# Altium PCB SFPextension.PcbDoc
Units mm, origin at the board's own origin, x right, y up, seen from the top; angles counter-clockwise.
Board outline 66.9 x 25.57 mm, 2 copper layers (Top Layer, Bottom Layer); 3 components, 14 nets, 47 pads, 51 vias.
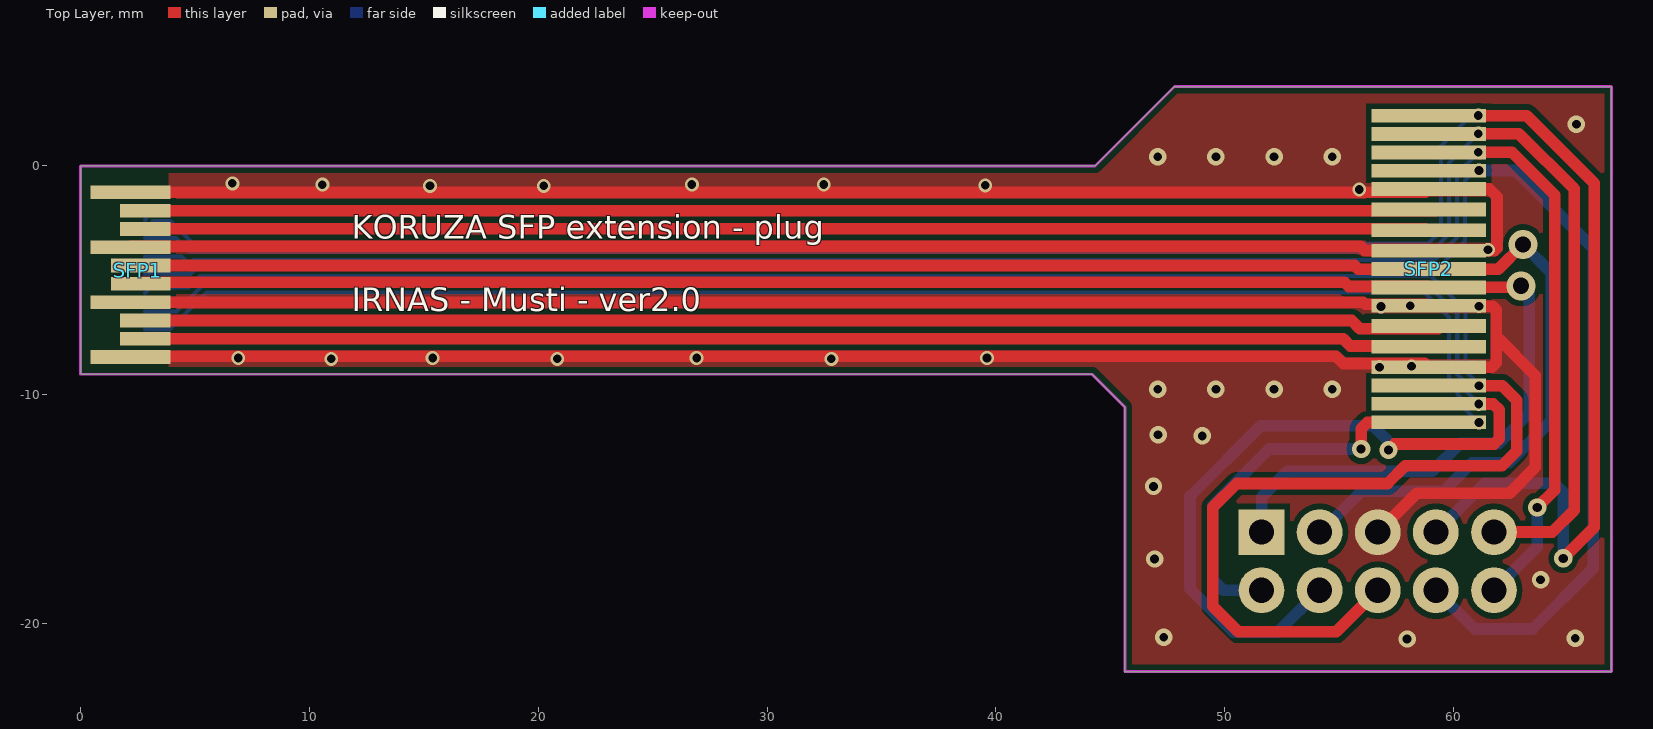
[diagram p0: Top Layer view]
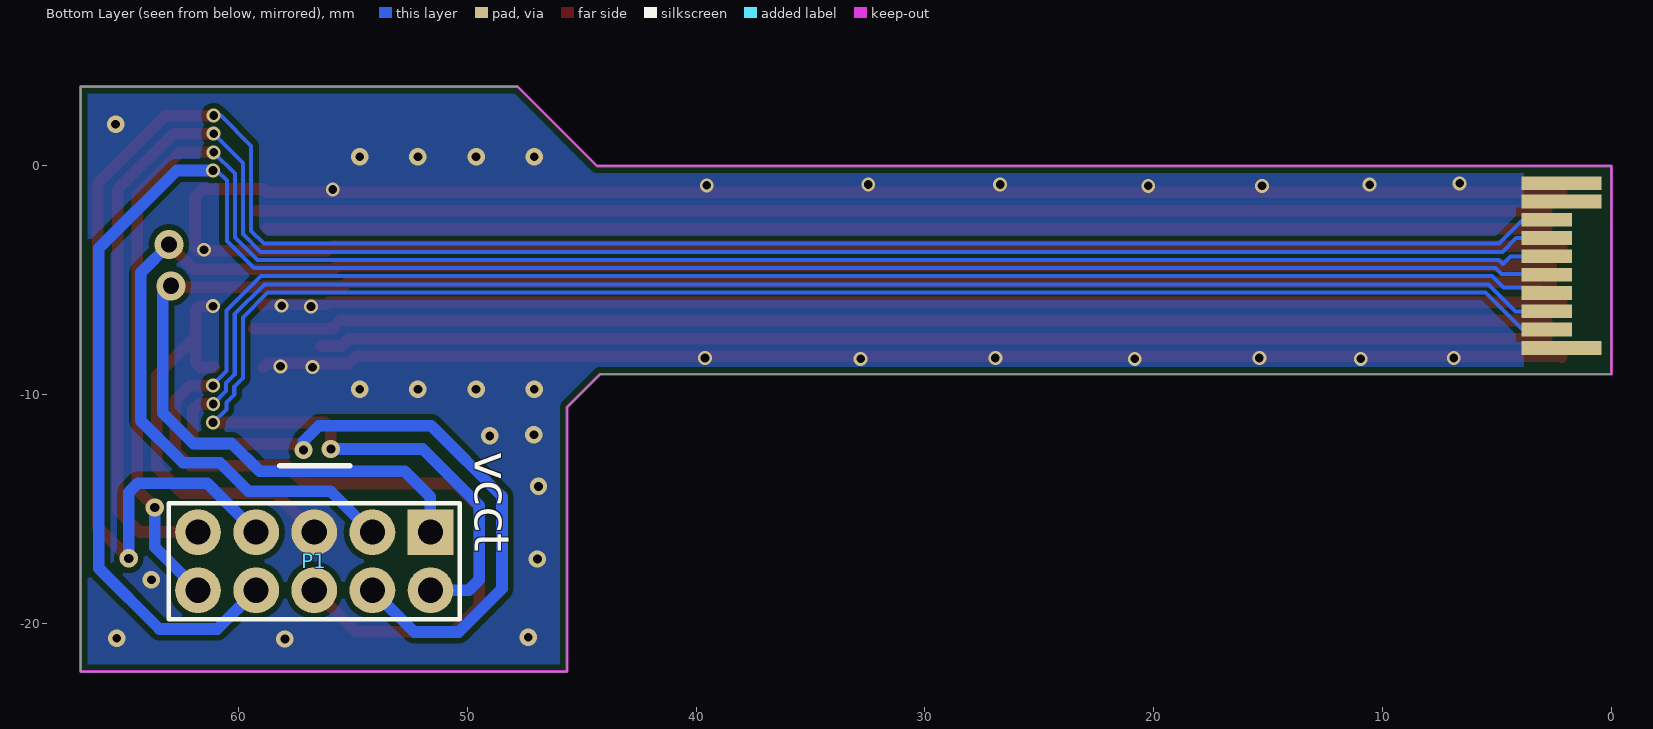
[diagram p1: Bottom Layer view, seen from below]

## Layer stack, top to bottom
Top Solder: solder mask 0.0102, Solder Resist, Dk 3.5
Top Layer: signal copper 0.0356
Dielectric1: dielectric 0.32, FR-4, Dk 4.8
Bottom Layer: signal copper 0.0356
Bottom Solder: solder mask 0.0102, Solder Resist, Dk 3.5

## Board outline
0,-9.1 0,0 44.327,0 47.8,3.473 66.9,3.473 66.9,-22.098 45.639,-22.098 45.639,-10.541 44.198,-9.1

## Design rules (kind name [scope] priority, off if disabled: settings)
Clearance Clearance_2 [InPolygon] p1: gap=0.254
Clearance Clearance_3 [(InDifferentialPairClass('All Differential Pairs')) vs (InNet('GND')) and (InPadClass('All Pads'))] p2: gap=0.178
Clearance Clearance_1 [(InDifferentialPairClass('All Differential Pairs')) and not (InPadClass('All Pads')) vs InNet('GND')] p3: gap=0.254
Clearance [All] p4: gap=0.178
DiffPairsRouting [All] p1: maxlimit=0.254 minlimit=0.254 mostfreqgap=0.254 toplayer_minwidth=0.508 toplayer_maxwidth=0.508 toplayer_prefwidth=0.508 bottomlayer_minwidth=0.508 bottomlayer_maxwidth=0.508 bottomlayer_prefwidth=0.508 maxuncoupledlength=12.7
MinimumSolderMaskSliver [All] p1: minsoldermaskwidth=0.025
PlaneConnect [All] p1: planeconnectstyle=Direct reliefexpansion=0.508 reliefentries=4 reliefconductorwidth=0.254 reliefairgap=0.254
PolygonConnect [All] p1: connectstyle=Direct reliefconductorwidth=0.508 reliefentries=4 polygonreliefangle="90 Angle" airgapwidth=0.254
RoutingVias [All] p1: holewidth=0.711 width=1.27 viastyle="Through Hole" minholewidth=0.711 minwidth=1.27 maxholewidth=0.711 maxwidth=1.27
SilkToSilkClearance [All] p1: silktosilkclearance=0
SilkToSolderMaskClearance SilkscreenOverComponentPads [IsPad] p1: minsilkscreentomaskgap=0.025 clearancetoexposedcopper=TRUE
SolderMaskExpansion [All] p1: expansion=0.102
Width [All] p1: maxlimit=2.54 minlimit=0.178 preferedwidth=0.508 minimp=50.000000 maximp=50.000000 favimp=50.000000
25 further rules are at their usual default settings.

## Classes and differential pairs
component class SFPextension: P1 SFP2
differential pair TD: +TD_P -TD_N
differential pair RD: +RD_P -RD_N

## Components (designator, comment, footprint, x,y, rotation, side; value= is the part's Value field where it differs from the comment)
P1 "IDC10" HDR2X5_CEN 51.608,-16.002 r0 bottom
SFP1 "SFP connector" "SFP PCB CON" 2.5,-4.55 r90 top
SFP2 "SFP PCB connector" "SFP pcb con solder" 58.911,-7.706 r90 top

## Footprints (in the part's own frame and the unit in brackets; to place one, negate y for a bottom-side part, rotate by r counter-clockwise, add the part's x,y. Pads: shape width x height; smd on the part's side, far side on the other; paste and mask are expansions set on the pad)
HDR2X5_CEN [mm] "Connector; Header; 5x2 Position"
  rect 2x2 hole 1.1: 1(0,0)
  round 2 hole 1.1: 2(2.54,0) 3(5.08,0) 4(7.62,0) 5(10.16,0) 6(0,2.54) 7(2.54,2.54) 8(5.08,2.54) 9(7.62,2.54) 10(10.16,2.54)
  silkscreen extent -1.27,-1.27 11.43,3.81
"SFP PCB CON" [mm]
  rect 0.6x3.5 smd far side: 1(-3.4,0.325) 9(3,0.325) 10(3.8,0.325)
  rect 0.6x2.2 smd far side: 2(-2.6,-0.325) 3(-1.8,-0.325) 4(-1,-0.325) 5(-0.2,-0.325) 6(0.6,-0.325) 7(1.4,-0.325) 8(2.2,-0.325)
  rect 0.6x3.5 smd: 11(3.4,0.325) 14(1,0.325) 17(-1.4,0.325) 20(-3.8,0.325)
  rect 0.6x2.2 smd: 12(2.6,-0.325) 13(1.8,-0.325) 18(-2.2,-0.325) 19(-3,-0.325)
  rect 0.6x2.6 smd: 15(0.2,-0.125) 16(-0.6,-0.125)
"SFP pcb con solder" [mm]
  rect 0.6x5 smd: 2(-3.49,0) 3(-2.69,0) 4(-1.89,0) 5(7.5,0) 6(8.3,0) 7(9.1,0) 8(9.9,0) 11(6.7,0) 12(5.8,0) 13(4.9,0) 14(4,0) 15(3.2,0) 16(2.4,0) 17(1.6,0) 18(0.71,0) 19(-0.19,0) 20(-1.09,0)

## Part data
P1: library part "Header 5X2A", "Header, 5-Pin, Dual row"

## Via types
v1: diameter 0.61, hole 0.381, Top Layer to Bottom Layer, tented both sides, 26 vias
v2: diameter 0.762, hole 0.381, Top Layer to Bottom Layer, tented both sides, 17 vias
v3: diameter 0.8, hole 0.4, Top Layer to Bottom Layer, tented both sides, 4 vias
v4: diameter 0.61, hole 0.381, Top Layer to Bottom Layer, 2 vias
v5: diameter 1.27, hole 0.711, Top Layer to Bottom Layer, tented both sides, 2 vias

## Nets (pads, with @x,y where several pads share a name; then routed paths per layer and width w, separated by ;. In a path a pad name is that pad's centre, name@x,y a point inside that pad or via, vN(x,y) a via of type N, cw(c..) or ccw(c..) an arc to the next point about the centre after c; other vN are vias at no path point)
GND: P1.3 SFP1.1 SFP1.9 SFP1.10 SFP1.11 SFP1.14 SFP1.17 SFP1.20 SFP2.11 SFP2.14 SFP2.17 SFP2.20 | length 254.4
  Top Layer w0.508: SFP1.20 2.213,-8.312 54.858,-8.312 55.177,-8.631 56.694,-8.631 56.698,-8.628 58.743,-8.628 SFP2.20 ; SFP1.17 56.057,-5.95 56.145,-6.038 58.843,-6.038 SFP2.17 ; SFP1.14 2.213,-3.512 55.936,-3.512 56.13,-3.706 SFP2.14 61.791,-3.706 61.902,-3.595 61.902,-1.345 61.56,-1.003 58.914,-1.003 SFP2.11 58.767,-1.15 SFP1.11 ; P1.3 58.392,-14.298 62.453,-14.298 63.578,-13.173 63.578,-9.156 61.87,-7.448 ; SFP2.20@61.064,-8.796 61.11,-8.749 61.157,-8.796 61.677,-8.796 61.87,-8.603 61.87,-7.448 ; v1(61.11,-6.125) 61.71,-6.125 61.87,-6.284 61.87,-7.448
  other v1: 56.761,-8.793 58.16,-8.756 10.955,-8.429 20.83,-8.429 32.808,-8.429 6.891,-8.394 15.385,-8.389 26.926,-8.394 39.61,-8.392 56.835,-6.14 58.11,-6.107 15.27,-0.866 20.241,-0.866 39.535,-0.847 10.566,-0.818 26.712,-0.808 32.477,-0.808 6.63,-0.756
  other v2: 57.971,-20.671 65.314,-20.641 47.332,-20.595 63.805,-18.08 46.934,-17.176 46.888,-14.003 49.018,-11.795 47.087,-11.749 47.077,-9.757 49.617,-9.757 52.157,-9.757 54.697,-9.757 47.077,0.403 49.617,0.403 52.157,0.403 54.697,0.403 65.371,1.826
  other v4: 61.51,-3.66 55.879,-1.026
LOS: P1.4 SFP1.8 SFP2.8 | length 95.6
  Top Layer w0.508: v1(61.085,2.203) 63.194,2.203 66.152,-0.754 66.152,-15.787 v3(64.793,-17.147)
  Bottom Layer w0.178: SFP1.8 SFP1.8@2.852,-2.323 ; SFP1.8@3.142,-2.406 3.919,-2.406 4.907,-3.394 58.883,-3.394 59.444,-2.833 59.444,0.88 60.767,2.203 v1(61.085,2.203)
  Bottom Layer w0.508: P1.4 61.362,-13.868 64.396,-13.868 64.793,-14.265 v3(64.793,-17.147)
MOD_DEF0: P1.10 SFP1.6 SFP2.6 | length 84.6
  Top Layer w0.508: SFP2.6@61.146,0.538 v1(61.085,0.599) 62.555,0.599 64.421,-1.267 64.421,-14.161 v3(63.661,-14.921)
  Bottom Layer w0.178: SFP1.6 4.416,-3.95 4.747,-4.281 4.923,-4.105 59.177,-4.105 60.155,-3.128 60.155,-0.331 v1(61.085,0.599)
  Bottom Layer w0.508: P1.10 63.661,-16.649 v3(63.661,-14.921)
MOD_DEF1: P1.9 SFP1.5 SFP2.5 | length 90.8
  Bottom Layer w0.178: SFP1.5 2.854,-4.721 4.81,-4.721 5.07,-4.461 59.325,-4.461 60.51,-3.275 60.51,-0.641 60.953,-0.198 v1(61.114,-0.198)
  Bottom Layer w0.508: P1.9 60.92,-20.234 63.451,-20.234 66.103,-17.582 66.103,-3.596 62.705,-0.198 v1(61.114,-0.198)
MOD_DEF2: P1.8 SFP1.4 SFP2.4 | length 93.3
  Top Layer w0.508: P1.8 54.883,-20.347 50.592,-20.347 49.486,-19.241 49.486,-14.915 50.526,-13.875 57.113,-13.875 57.892,-13.096 62.121,-13.096 62.76,-12.457 62.76,-10.233 62.126,-9.599 v1(61.11,-9.599)
  Bottom Layer w0.178: SFP1.4 3.058,-5.317 4.035,-5.317 4.038,-5.314 4.72,-5.314 5.218,-4.816 59.016,-4.816 60.519,-6.319 60.519,-8.966 61.11,-9.558 v1(61.11,-9.599)
RATE_SEL: P1.5 SFP1.7 SFP2.7 | length 85.5
  Top Layer w0.508: v1(61.085,1.411) 62.857,1.411 65.269,-1.001 65.269,-15.041 64.315,-15.995 P1.5@61.837,-15.995
  Bottom Layer w0.178: SFP1.7 4.16,-3.15 4.759,-3.75 59.03,-3.75 59.799,-2.98 59.799,0.124 v1(61.085,1.411)
RD_N: SFP1.12 SFP2.12 | length 56.4
  Top Layer w0.508: SFP1.12 SFP2.12@59.213,-1.95
RD_P: SFP1.13 SFP2.13 | length 55.9
  Top Layer w0.508: SFP1.13 SFP2.13@58.77,-2.75
TD_N: SFP1.19 SFP2.19 | length 53.7
  Top Layer w0.508: SFP1.19 55.173,-7.55 55.492,-7.869 56.379,-7.869
TD_P: SFP1.18 SFP2.18 | length 56.7
  Top Layer w0.508: SFP1.18 55.551,-6.75 55.908,-7.107 SFP2.18@59.339,-7.107
TX_DISABLE: P1.7 SFP1.3 SFP2.3 | length 91.8
  Top Layer w0.508: v3(57.158,-12.408) 57.415,-12.151 61.769,-12.151 61.999,-11.921 61.999,-10.655 61.743,-10.399 v1(61.102,-10.399)
  Bottom Layer w0.178: SFP1.3 4.187,-6.35 5.365,-5.172 58.869,-5.172 60.163,-6.466 60.163,-9.113 60.539,-9.489 60.539,-9.836 v1(61.102,-10.399)
  Bottom Layer w0.508: P1.7 52.326,-20.364 50.374,-20.364 48.484,-18.474 48.484,-14.444 51.579,-11.35 56.481,-11.35 57.158,-12.027 v3(57.158,-12.408)
TX_FAULT: P1.6 SFP1.2 SFP2.2 | length 82.5
  Top Layer w0.508: v3(55.961,-12.369) 55.961,-11.483 56.233,-11.211 v1(61.11,-11.211)
  Bottom Layer w0.178: SFP1.2 3.89,-7.15 5.512,-5.528 58.722,-5.528 59.808,-6.614 59.808,-9.261 60.183,-9.636 60.183,-9.983 60.531,-10.331 60.531,-10.635 61.107,-11.211 v1(61.11,-11.211)
  Bottom Layer w0.508: P1.6 49.944,-18.542 49.481,-18.079 49.481,-14.839 51.951,-12.369 v3(55.961,-12.369)
VCCR: P1.2 SFP1.15 SFP2.15 | length 81.2
  Top Layer w0.508: SFP1.15 55.683,-4.35 55.839,-4.506 SFP2.15 61.961,-4.506 v5(63.039,-3.428)
  Bottom Layer w0.508: P1.2@54.185,-16.011 55.978,-14.218 59.564,-14.218 60.809,-12.973 62.424,-12.973 64.268,-11.128 64.268,-4.657 v5(63.039,-3.428)
VCCT: P1.1 SFP1.16 SFP2.16 | length 81
  Top Layer w0.508: SFP1.16 2.693,-5.082 55.237,-5.082 55.419,-5.264 58.87,-5.264 SFP2.16 62.885,-5.306 v5(62.953,-5.237)
  Bottom Layer w0.508: P1.1@51.613,-16.061 51.613,-14.459 52.728,-13.344 59.073,-13.344 60.289,-12.128 61.98,-12.128 63.312,-10.797 63.312,-5.596 v5(62.953,-5.237)

## Polygon pours and split planes (outlines as drawn)
GND on Top Layer "GND_L01_P000" (solid, remove dead copper, pour order 0): 3.85,-9.1 3.85,0 44.327,0 47.8,3.473 66.9,3.473 66.9,-22.098 45.639,-22.098 45.639,-10.541 44.198,-9.1
GND on Bottom Layer "GND_L02_P001" (solid, remove dead copper, pour order 1): 3.822,-9.1 3.822,0 44.327,0 47.8,3.473 66.9,3.473 66.9,-22.098 45.639,-22.098 45.639,-10.541 44.198,-9.1

## Keep-outs
Keep-Out Layer:
  lines w0.127: 0,-9.1 0,0 25.731,0 44.327,0 47.8,3.473 66.9,3.473 66.9,-22.098 45.639,-22.098 45.639,-10.541 44.198,-9.1 9.781,-9.1 0,-9.1

## Silkscreen, mask and mechanical layers (free items; w line width, h text height)
Top Overlay:
  text "KORUZA SFP extension - plug" at 11.857,-3.175 h1.02
  text "IRNAS - Musti - ver2.0" at 11.857,-6.35 h1.02
Bottom Overlay:
  lines w0.254: 55.135,-13.096 58.183,-13.096
  text "vcct" at 49.669,-12.49 h1.52 r90